# Altium PCB PCB_PCB_Light Bar Controller v2_2_2022-02-16_2022-04-08.pcbdoc
Units mil, origin at the board's own origin, x right, y up, seen from the top; angles counter-clockwise.
Board outline 2760 x 3460 mil, 2 copper layers (Top Layer, Bottom Layer); 1 components, 5 nets, 37 pads, 0 vias.
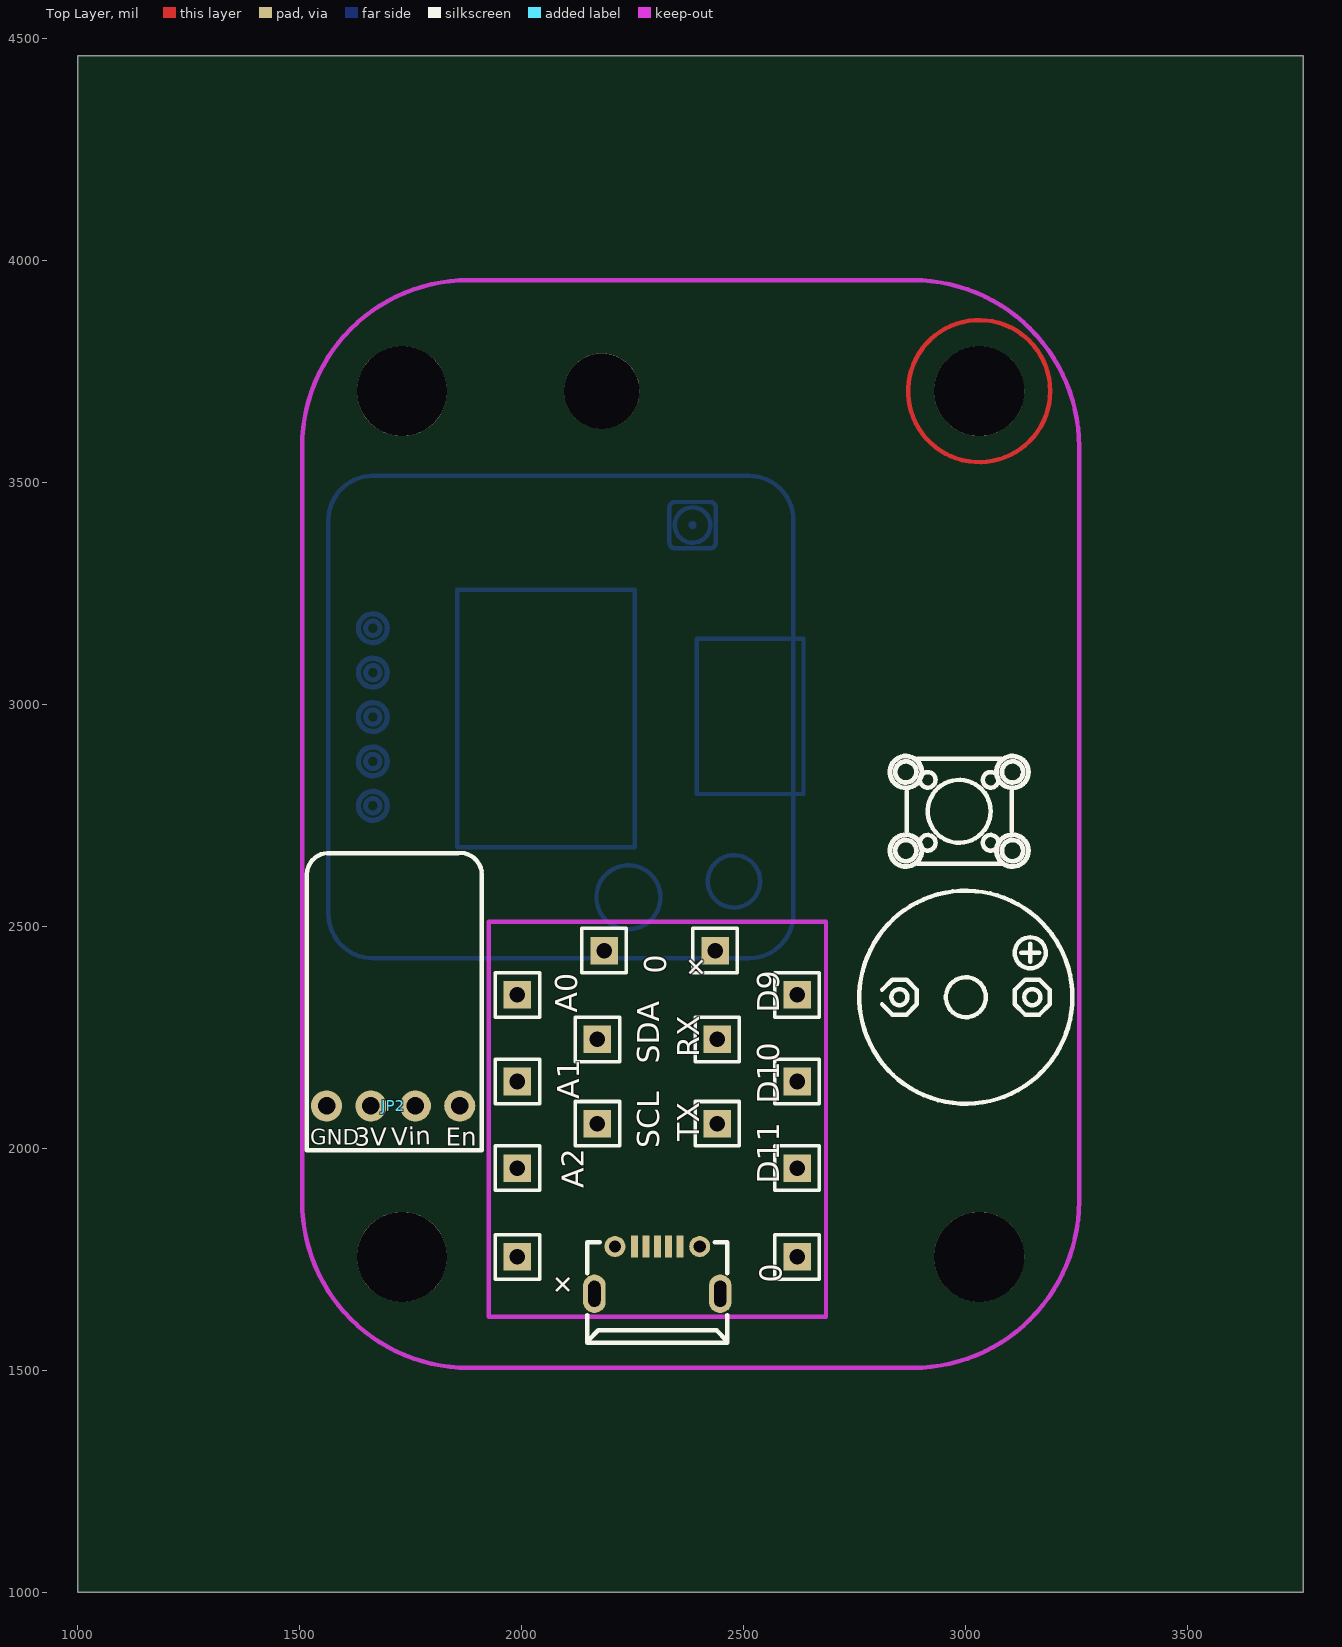
[diagram p0: Top Layer view]
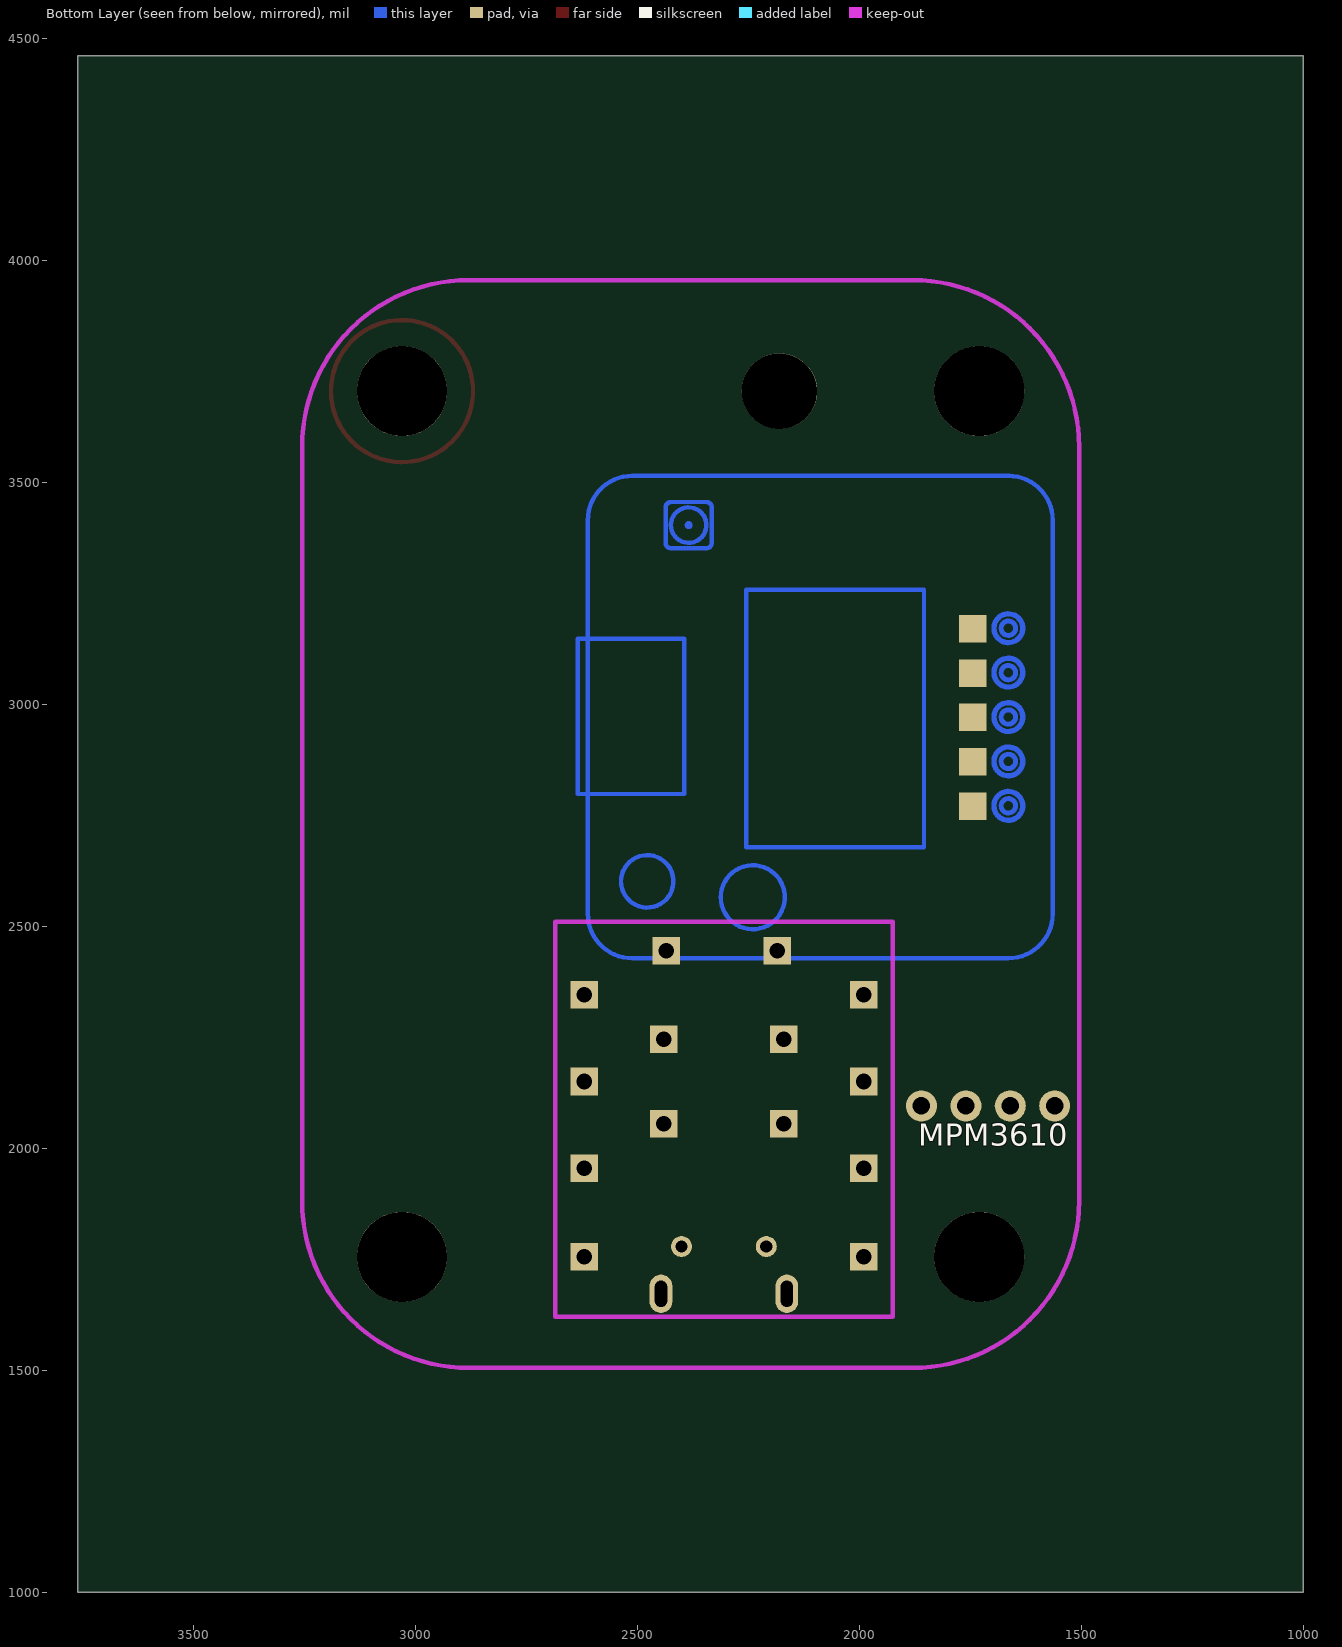
[diagram p1: Bottom Layer view, seen from below]

## Layer stack, top to bottom
Top Layer: signal copper (thickness not stored)
Dielectric: dielectric 12.6, FR-4, Dk 4.8
Bottom Layer: signal copper (thickness not stored)

## Board outline
3760,1000 1000,1000 1000,4460 3760,4460

## Components (designator, comment, footprint, x,y, rotation, side; value= is the part's Value field where it differs from the comment)
JP2 "1X04_ROUND" 1X04_ROUND 1710,2095 r180 top

## Footprints (in the part's own frame and the unit in brackets; to place one, negate y for a bottom-side part, rotate by r counter-clockwise, add the part's x,y. Pads: shape width x height; smd on the part's side, far side on the other; paste and mask are expansions set on the pad)
1X04_ROUND [mil]
  round 70 hole 39.36: 1(-150,0) 2(-50,0) 3(50,0) 4(150,0)

## Free pads (board coordinates)
  oval 51.18x86.61 hole 27.56 slot 59.06 at 90 deg: 0(2163.27,1671.85) 0(2446.73,1671.85)
  round 47.24 hole 27.56: 0(2209.53,1778.15) 0(2400.47,1778.15)
  rect 62x62 smd far side: 1(1745,2770) 1(1745,2870) 1(1745,2970) 1(1745,3070) 1(1745,3170)
  rect 62x62 hole 35: 1(1990,1755) 1(1990,1955) 1(1990,2150) 1(1990,2345) 1(2170,2055) 1(2170,2245) 1(2185,2445) 1(2435,2445) 1(2440,2055) 1(2440,2245) 1(2620,1755) 1(2620,1955) 1(2620,2150) 1(2620,2345)
  rect 15.75x49.21 smd: 1(2253.82,1778.15) 2(2279.41,1778.15) 3(2305,1778.15) 4(2330.59,1778.15) 5(2356.18,1778.15)
  round 203 hole 203 unplated: ""(1730,1755) ""(1730,3705) ""(3030,1755) ""(3030,3705)
  round 170 hole 170 unplated: ""(2180,3705)

## Nets (pads, with @x,y where several pads share a name; then routed paths per layer and width w, separated by ;. In a path a pad name is that pad's centre, name@x,y a point inside that pad or via, vN(x,y) a via of type N, cw(c..) or ccw(c..) an arc to the next point about the centre after c; other vN are vias at no path point)
3.3V: JP2.3
EN: JP2.1
GND: JP2.4
S$2834:  | length 1005.3
  Top Layer w10: 3190,3705 ccw(c3030,3705) 3190,3705
VIN: JP2.2
copper on no net: | length 13379.9
  Bottom Layer w10: 1564.31,3414.24 cw(c1664.31,3414.24) 1664.31,3514.24 ; 1564.31,3417.63 1564.31,2527.63 ccw(c1664.31,2527.63) 1664.31,2427.63 2511.55,2427.63 ccw(c2511.55,2527.63) 2611.55,2527.63 2611.55,3414.25 ccw(c2511.55,3414.25) 2511.55,3514.25 1661.56,3514.25 ; 2332.35,3363.21 2332.35,3443.21 ; 2332.39,3363.24 ccw(c2344.39,3363.24) 2344.39,3351.24 ; 2332.39,3443.24 cw(c2344.39,3443.24) 2344.39,3455.24 ; 2344.36,3351.22 2424.36,3351.22 ; 2344.36,3455.22 2424.36,3455.22 ; 2424.39,3351.24 ccw(c2424.39,3363.24) 2436.39,3363.24 ; 2424.39,3455.24 cw(c2424.39,3443.24) 2436.39,3443.24 ; 2436.35,3363.21 2436.35,3443.21 ; 1681.06,2770.94 ccw(c1664.31,2770.94) 1681.06,2770.94 ; 1681.06,2770.94 ccw(c1664.31,2770.94) 1681.06,2770.94 ; 1681.06,2870.94 ccw(c1664.31,2870.94) 1681.06,2870.94 ; 1681.06,2870.94 ccw(c1664.31,2870.94) 1681.06,2870.94 ; 1681.06,2970.94 ccw(c1664.31,2970.94) 1681.06,2970.94 ; 1681.06,2970.94 ccw(c1664.31,2970.94) 1681.06,2970.94 ; 1681.06,3070.94 ccw(c1664.31,3070.94) 1681.06,3070.94 ; 1681.06,3070.94 ccw(c1664.31,3070.94) 1681.06,3070.94 ; 1681.06,3170.94 ccw(c1664.31,3170.94) 1681.06,3170.94 ; 1681.06,3170.94 ccw(c1664.31,3170.94) 1681.06,3170.94 ; 1697.81,2770.94 ccw(c1664.31,2770.94) 1697.81,2770.94 ; 1697.81,2770.94 ccw(c1664.31,2770.94) 1697.81,2770.94 ; 1697.81,2870.94 ccw(c1664.31,2870.94) 1697.81,2870.94 ; 1697.81,2870.94 ccw(c1664.31,2870.94) 1697.81,2870.94 ; 1697.81,2970.94 ccw(c1664.31,2970.94) 1697.81,2970.94 ; 1697.81,2970.94 ccw(c1664.31,2970.94) 1697.81,2970.94 ; 1697.81,3070.94 ccw(c1664.31,3070.94) 1697.81,3070.94 ; 1697.81,3070.94 ccw(c1664.31,3070.94) 1697.81,3070.94 ; 1697.81,3170.94 ccw(c1664.31,3170.94) 1697.81,3170.94 ; 1697.81,3170.94 ccw(c1664.31,3170.94) 1697.81,3170.94 ; 1680.06,2770.94 ccw(c1664.31,2770.94) 1680.06,2770.94 ; 1680.06,2870.94 ccw(c1664.31,2870.94) 1680.06,2870.94 ; 1680.06,2970.94 ccw(c1664.31,2970.94) 1680.06,2970.94 ; 1680.06,3070.94 ccw(c1664.31,3070.94) 1680.06,3070.94 ; 1680.06,3170.94 ccw(c1664.31,3170.94) 1680.06,3170.94 ; 1695.81,2770.94 ccw(c1664.31,2770.94) 1695.81,2770.94 ; 1695.81,2870.94 ccw(c1664.31,2870.94) 1695.81,2870.94 ; 1695.81,2970.94 ccw(c1664.31,2970.94) 1695.81,2970.94 ; 1695.81,3070.94 ccw(c1664.31,3070.94) 1695.81,3070.94 ; 1695.81,3170.94 ccw(c1664.31,3170.94) 1695.81,3170.94 ; 1854.31,2677.63 2254.31,2677.63 2254.31,3257.63 1854.31,3257.63 1854.31,2677.63 ; 2312.11,2565 ccw(c2240,2565) 2312.11,2565 ; 2388.39,3403.23 ccw(c2384.39,3403.23) 2388.39,3403.23 ; 2394.31,2797.63 2394.31,3147.63 2634.31,3147.63 2634.31,2797.63 2394.31,2797.63 ; 2424.39,3403.23 ccw(c2384.39,3403.23) 2424.39,3403.23 ; 2536.75,2600.86 ccw(c2477.69,2600.86) 2536.75,2600.86

## Keep-outs
Keep-Out Layer:
  lines w10: 1505,1879.8 ccw(c1879.8,1879.8) 1879.8,1505 ; 1505,3580.2 cw(c1879.8,3580.2) 1879.8,3955 ; 2880.2,1505 ccw(c2880.2,1879.8) 3255,1879.8 ; 2880.2,3955 cw(c2880.2,3580.2) 3255,3580.2

## Silkscreen, mask and mechanical layers (free items; w line width, h text height)
Top Overlay:
  drawing of 153 lines, arcs and shapes, not listed
  text "0" at 2275.39,2435 h49.21 r270
  text "+" at 2357.6,2412.6 h49.21 r315
  text "A0" at 2124.61,2305 h49.21 r90
  text "D9" at 2579.61,2305 h49.21 r90
  text "RX" at 2399.61,2205 h49.21 r90
  text "SDA" at 2309.61,2190 h49.21 r90
  text "A1" at 2129.61,2110 h49.21 r90
  text "D10" at 2579.61,2100 h49.21 r90
  text "TX" at 2399.61,2015 h49.21 r90
  text "GND" at 1522.75,2007.5 h35
  text "3V" at 1624,2005 h40
  text "Vin" at 1706.7,2005.01 h40 r2
  text "En" at 1829,2005 h40
  text "SCL" at 2309.61,2000 h49.21 r90
  text "D11" at 2579.61,1920 h49.21 r90
  text "A2" at 2139.61,1910 h49.21 r90
  text "0" at 2535.39,1740 h49.21 r270
  text "+" at 2097.6,1727.4 h49.21 r225
Bottom Overlay:
  text "MPM3610" at 1867.5,2005 h50
Top Paste:
  region: 2364.06,1802.75 2364.06,1753.54 2348.31,1753.54 2348.31,1802.75
  region: 2338.47,1802.75 2338.47,1753.54 2322.72,1753.54 2322.72,1802.75
  region: 2312.88,1802.75 2312.88,1753.54 2297.13,1753.54 2297.13,1802.75
  region: 2287.28,1802.75 2287.28,1753.54 2271.53,1753.54 2271.53,1802.75
  region: 2261.69,1802.75 2261.69,1753.54 2245.94,1753.54 2245.94,1802.75
  region: 2421.14,1689.56 cw(c2446.73,1689.56) 2472.32,1689.56 2472.32,1654.13 cw(c2446.73,1654.13) 2421.14,1654.13 2421.14,1689.56
  region: 2137.68,1689.56 cw(c2163.27,1689.56) 2188.86,1689.56 2188.86,1654.13 cw(c2163.27,1654.13) 2137.68,1654.13 2137.68,1689.56
  circle w23.62: c2209.53,1778.15 r11.81
  circle w23.62: c2400.47,1778.15 r11.81
Document:
  circle w7.87: c2245.95,1809.64 r3.94